# Altium PCB front_flex_dev_board.PcbDoc
Units mil, origin at the board's own origin, x right, y up, seen from the top; angles counter-clockwise.
Board outline 4005 x 780 mil, 2 copper layers (Top Layer, Bottom Layer); 21 components, 39 nets, 78 pads, 0 vias.
Unrouted connection lines stored in the file: 47.
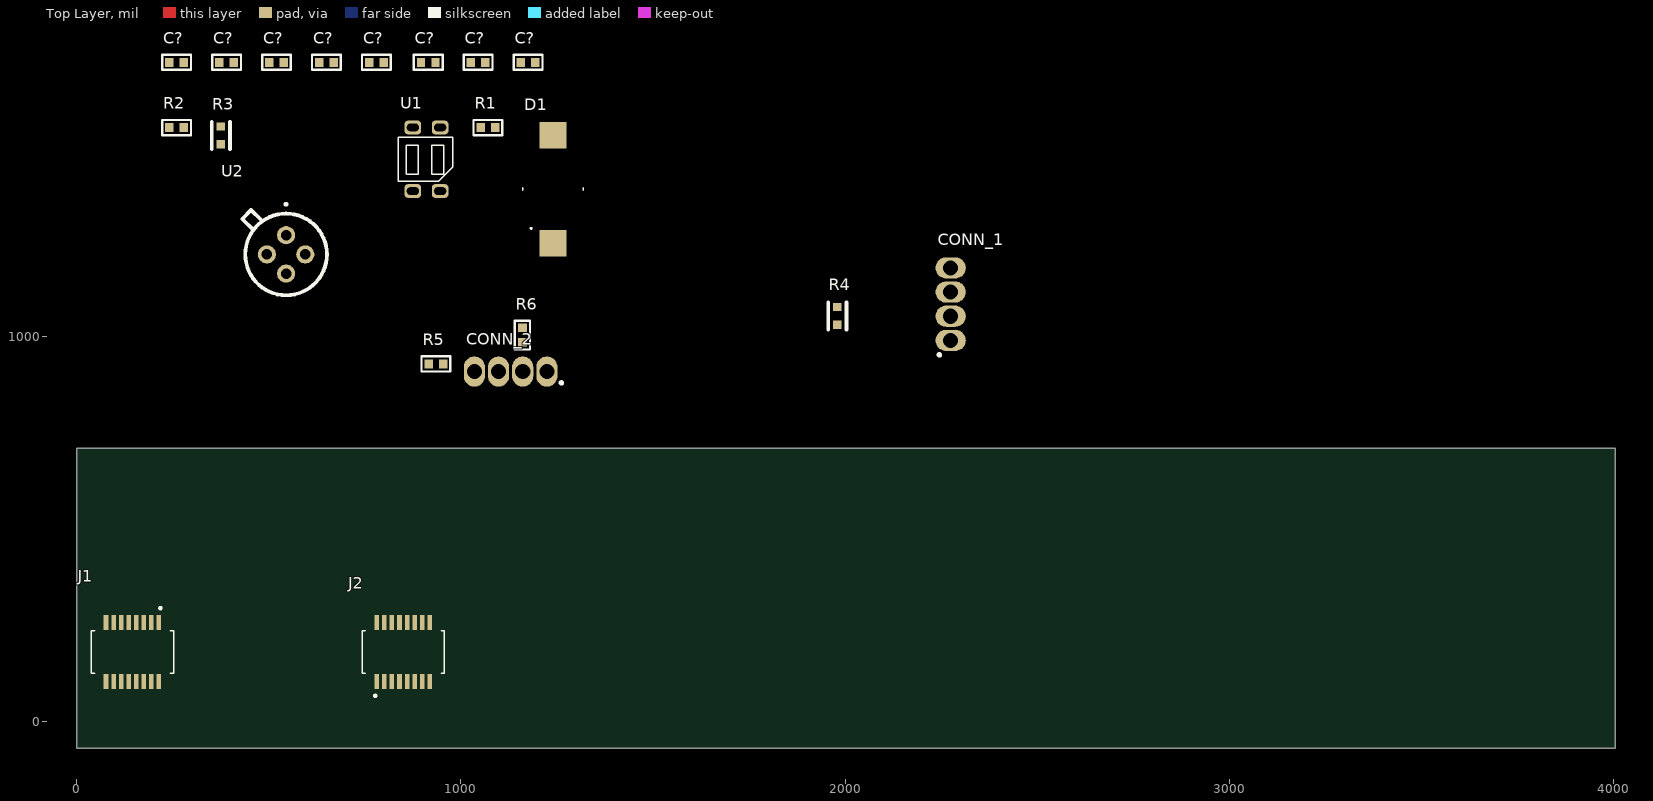
[diagram p0: Top Layer view]
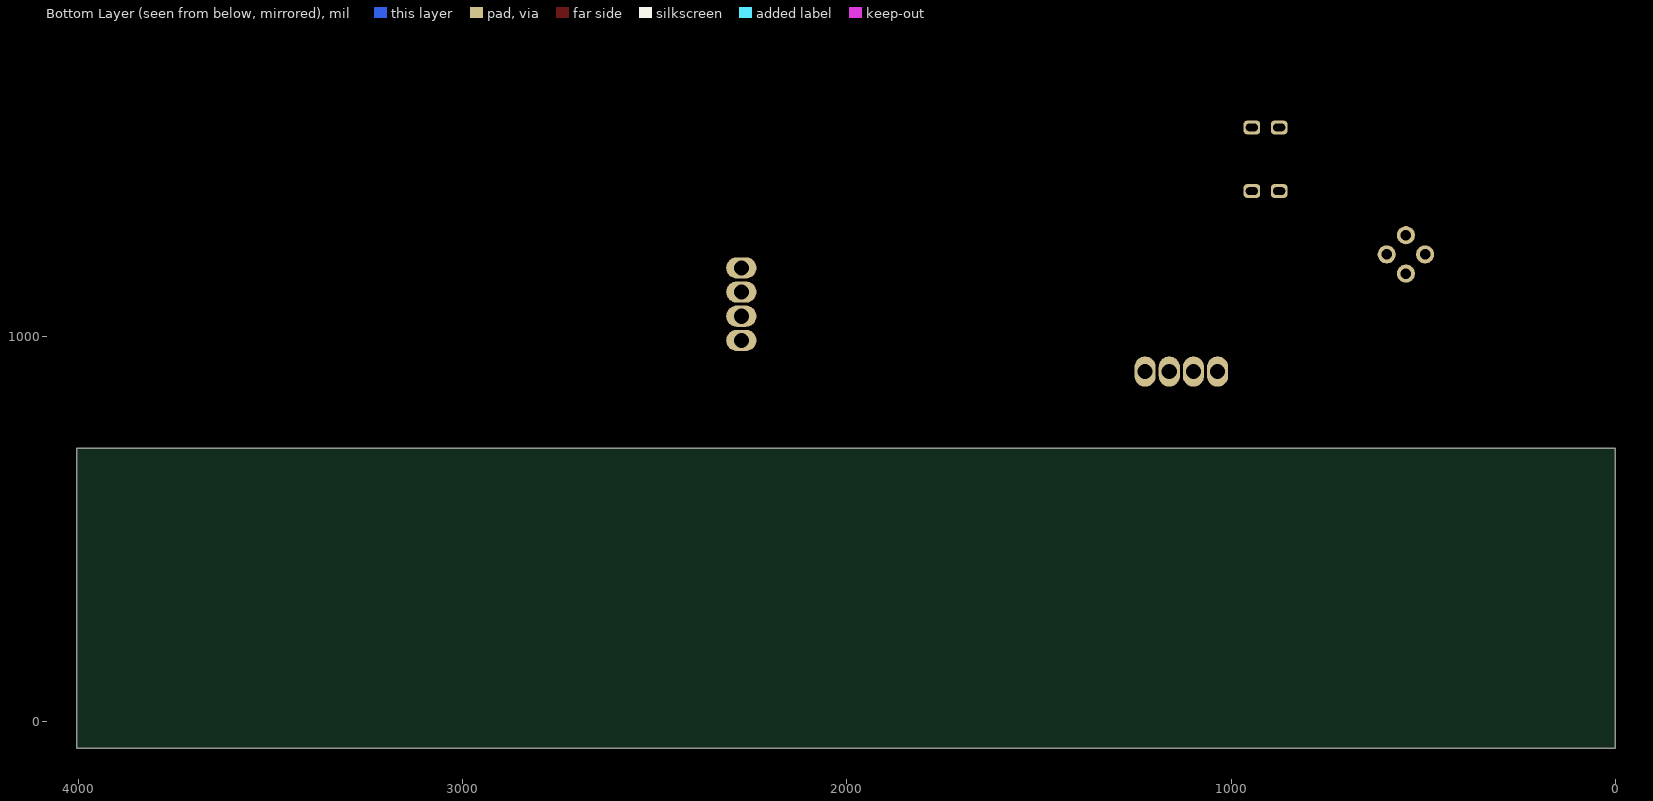
[diagram p1: Bottom Layer view, seen from below]

## Layer stack, top to bottom
Top Solder: solder mask 0.4, Solder Resist, Dk 3.5
Top Layer: signal copper 1.4
Dielectric 1: dielectric 12.6, FR-4, Dk 4.8
Bottom Layer: signal copper 1.4
Bottom Solder: solder mask 0.4, Solder Resist, Dk 3.5

## Board outline
0,-70 4005,-70 4005,710 0,710

## Design rules (kind name [scope] priority, off if disabled: settings)
Clearance [All] p1: gap=6 ignorepadtopadclearanceinfootprint=FALSE except(0: Arc-Hole Track-Hole SMDPad-Hole THPad-Hole Via-Hole Fill-Hole Poly-Hole Region-Hole Text-Hole; 10: Text-Text)
PolygonConnect [All] p1: connectstyle=Relief reliefconductorwidth=10 reliefentries=4 polygonreliefangle="90 Angle" airgapwidth=10
RoutingVias [All] p1: holewidth=9.84 width=19.68 viastyle="Through Hole" minholewidth=7.87 minwidth=15.75 maxholewidth=11.81 maxwidth=23.62
SolderMaskExpansion [All] p1: expansion=4
Width PWR [InNet('GND')] p1: maxlimit=20 minlimit=10 preferedwidth=10 minimp=50.000000 maximp=50.000000 favimp=50.000000
Width [All] p2: maxlimit=10 minlimit=6 preferedwidth=6 minimp=50.000000 maximp=50.000000 favimp=50.000000
30 further rules are at their usual default settings.

## Classes and differential pairs
component class Sch_led: C? IC1 IC2 J1 J2 LED1 LED2 LED3 LED4 LED5 LED6
component class Sch_front: CONN_1 CONN_2 D1 R1 R2 R3 R4 R5 R6 U1 U2

## Components (designator, comment, footprint, x,y, rotation, side; value= is the part's Value field where it differs from the comment)
C? "0.47µF" 0402R 915,1715 r0 top
C? "1µF" 0402R 520,1715 r0 top
C? "0.47µF" 0402R 780,1715 r0 top
C? "1µF" 0402R 650,1715 r0 top
C? "0.47µF" 0402R 390,1715 r0 top
C? "0.47µF" 0402R 260,1715 r0 top
C? "1µF" 0402R 1175,1715 r0 top
C? "1µF" 0402R 1045,1715 r0 top
CONN_1 "THERMO" 4_pos_1mm_header 2275,1085.51 r90 top
CONN_2 "BLINK" 4_pos_1mm_header 1129.49,910 r180 top
D1 "VBPW34FASR" VBPW34FAS 1240,1385 r90 top
J1 "55560-0168" 555600168 145,180 r180 top
J2 "55560-0168" 555600168 850,180 r0 top
R1 "50K" 0402R 1070,1545 r0 top
R2 "100" 0402R 260,1545 r0 top
R3 "100k" SMD-0402-RES 375,1525 r0 top
R4 "100k" SMD-0402-RES 1980,1055 r0 top
R5 "100" 0402R 935,930 r0 top
R6 "50K" 0402R 1160,1005 r90 top
U1 "QRE1113" QRE1113_DIP 875,1380 r0 top
U2 "ZTP-135SR" ZTP-135SR 545,1215 r0 top

## Footprints (in the part's own frame and the unit in brackets; to place one, negate y for a bottom-side part, rotate by r counter-clockwise, add the part's x,y. Pads: shape width x height; smd on the part's side, far side on the other; paste and mask are expansions set on the pad)
4_pos_1mm_header [mm]
  oval 1.4x2 hole 1 mask-0.15: 1(-2.4,0) 2(-0.8,0) 3(0.8,0) 4(2.4,0)
  silkscreen extent -3.4,0.7 -3.3,0.8
0402R [mm]
  rect 0.559x0.6 smd: 1(-0.48,0) 2(0.48,0)
  silkscreen extent -0.95,-0.5 0.95,0.5, body extent -0.46,-0.25 0.5,0.25, height 0.3
555600168 [mm]
  rect 0.3x1 smd: 1(-1.75,-1.95) 2(-1.75,1.95) 3(-1.25,-1.95) 4(-1.25,1.95) 5(-0.75,-1.95) 6(-0.75,1.95) 7(-0.25,-1.95) 8(-0.25,1.95) 9(0.25,-1.95) 10(0.25,1.95) 11(0.75,-1.95) 12(0.75,1.95) 13(1.25,-1.95) 14(1.25,1.95) 15(1.75,-1.95) 16(1.75,1.95)
  silkscreen extent -2.73,-2.95 2.73,1.42, body extent -2.72,-2.15 2.73,2.15, height 1.16
QRE1113_DIP [mm] "QRE1113 IR PHOTODIODE/TRANSISTOR PAIR"
  rrect50% 1.1x0.9 hole 0.5 slot 0.8 at 0 deg: 1(1.8,0) 2(1.8,4.2) 3(0,4.2) 4(0,0)
  silkscreen extent -0.96,0.65 2.64,3.55
SMD-0402-RES [mm]
  rect 0.55x0.55 smd: 1(0,0.584) 2(0,-0.584)
  silkscreen extent -0.6,-0.9 0.6,0.9, body extent -0.28,-0.57 0.27,0.58, height 0.41
VBPW34FAS [mm] "IR Photodiode SMD (Vive)"
  rect 1.75x1.8 smd: 1(-3.575,0) 2(3.575,0)
  silkscreen extent -2.65,-2 0.08,2, body extent -3.29,-1.95 3.11,1.95, height 1.48
ZTP-135SR [mm]
  round 1.2 hole 0.7: 1(0,1.27) 2(1.27,0) 3(0,-1.27) 4(-1.27,0)
  silkscreen extent -2.9,-2.7 2.7,3.35, body extent -4.43,-3.77 3.8,4.46, height 3.4

## Part data
C? C? C? C?: library part GCM155C71A105KE38D, "CAP CER 0.47UF 10V X7S 0402", Digi-Key Part Number=490-13409-1-ND, Manufacturer="Murata Electronics North America", Operating Temperature="-55°C ~ 125°C", Package / Case="0402 (1005 Metric)", Ratings=AEC-Q200, Temperature Coefficient=X7S, Tolerance=±10%, Voltage=10V, @ qty=0, Applications=Automotive, Datasheets=http://www.murata.com/~/media/webrenewal/support/library/catalog/products/capacitor/mlcc/c03e.ashx, Factory Stock=0, Features=-, Height - Seated (Max)=-, Image=//media.digikey.com/Renders/Murata%20Renders/ZRB-SERIES-0402.jpg, Lead Spacing=-, Lead Style=-, Minimum Quantity=1, Mounting Type="Surface Mount, MLCC", Packaging="Cut Tape (CT)", Part Number=GCM155C71A105KE38D, Part Status=Active, Quantity Available=7240, Series=GCM, Size / Dimension="0.039\" L x 0.020\" W (1.00mm x 0.50mm)", Thickness (Max)="0.022\" (0.55mm)", Unit Price (USD)=0.12
C? C? C? C?: library part GCM155C71A105KE38D, "CAP CER 1UF 10V X7S 0402", Digi-Key Part Number=490-13409-1-ND, Manufacturer="Murata Electronics North America", Operating Temperature="-55°C ~ 125°C", Package / Case="0402 (1005 Metric)", Ratings=AEC-Q200, Temperature Coefficient=X7S, Tolerance=±10%, Voltage=10V, @ qty=0, Applications=Automotive, Datasheets=http://www.murata.com/~/media/webrenewal/support/library/catalog/products/capacitor/mlcc/c03e.ashx, Factory Stock=0, Features=-, Height - Seated (Max)=-, Image=//media.digikey.com/Renders/Murata%20Renders/ZRB-SERIES-0402.jpg, Lead Spacing=-, Lead Style=-, Minimum Quantity=1, Mounting Type="Surface Mount, MLCC", Packaging="Cut Tape (CT)", Part Number=GCM155C71A105KE38D, Part Status=Active, Quantity Available=7240, Series=GCM, Size / Dimension="0.039\" L x 0.020\" W (1.00mm x 0.50mm)", Thickness (Max)="0.022\" (0.55mm)", Unit Price (USD)=0.12
CONN_1 CONN_2: library part 4_pin_1mm_header
D1: "Diode", Manufacturer_Name=Vishay, Mouser Part Number=782-VBPW34FASR, RS Part Number=7689401, Datasheet Link=https://www.vishay.com/docs/81127/vbpw34fa.pdf, Height=1.3mm, Manufacturer_Part_Number=VBPW34FASR, Mouser Price/Stock=https://www.mouser.com/Search/Refine.aspx?Keyword=782-VBPW34FASR, RS Price/Stock=https://uk.rs-online.com/web/p/products/7689401
J1 J2: "Connector", Manufacturer_Name=Molex, Mouser Part Number=538-55560-0168, RS Part Number=7206558P, Allied_Number=70374726, Allied Price/Stock=https://www.alliedelec.com/molexincorporated-55560-0168/70374726/, Datasheet Link=https://www.molex.com/pdm_docs/sd/555600168_sd.pdf, Height=1.15mm, Manufacturer_Part_Number=55560-0168, Mouser Price/Stock=https://www.mouser.com/Search/Refine.aspx?Keyword=538-55560-0168, RS Price/Stock=http://uk.rs-online.com/web/p/products/7206558P
R1 R2 R5 R6: library part Resistor
R3 R4: library part ERJ-2GEJ104X, "RES SMD 100K OHM 5% 1/10W 0402", Digi-Key Part Number=P100KJCT-ND, Manufacturer="Panasonic Electronic Components", Operating Temperature="-55°C ~ 155°C", Package / Case="0402 (1005 Metric)", Power (Watts)="0.1W, 1/10W", Supplier Device Package=0402, Temperature Coefficient=±200ppm/°C, Tolerance=±5%, @ qty=1500, Composition="Thick Film", Datasheets=http://industrial.panasonic.com/www-cgi/jvcr13pz.cgi?E+PZ+3+AOA0001+ERJ2GEJ104X+7+WW, Factory Stock=0, Failure Rate=-, Features="Automotive AEC-Q200", Height - Seated (Max)="0.016\" (0.40mm)", Image=//media.digikey.com/Photos/Panasonic%20Photos/ERJ-PA2-Series.jpg, Minimum Quantity=1, Number of Terminations=2, Packaging="Cut Tape (CT)", Part Number=ERJ-2GEJ104X, Part Status=Active, Quantity Available=2387986, Series=ERJ, Size / Dimension="0.039\" L x 0.020\" W (1.00mm x 0.50mm)", Unit Price (USD)=0.00350
U1: "IR Emitter and Receiver"
U2: "Undefined or Miscellaneous", Manufacturer_Name="Amphenol Advanced Sensors", Mouser Part Number=527-ZTP-135SR, Allied_Number=70282698, Allied Price/Stock=https://www.alliedelec.com/amphenol-advanced-sensors-ztp-135sr/70282698/, Datasheet Link=https://www.amphenol-sensors.com/en/component/edocman/370-thermopile-ir-sensor-applications/download?Itemid=7967, Manufacturer_Part_Number=ZTP-135SR, Mouser Price/Stock=https://www.mouser.com/Search/Refine.aspx?Keyword=527-ZTP-135SR

## Nets (pads, with @x,y where several pads share a name; then routed paths per layer and width w, separated by ;. In a path a pad name is that pad's centre, name@x,y a point inside that pad or via, vN(x,y) a via of type N, cw(c..) or ccw(c..) an arc to the next point about the centre after c; other vN are vias at no path point)
3.3V: J1.5 R1.2 R3.1 R4.2 R6.2
5V: J1.13 J2.14
BATTERY_1: J1.4 J2.3
BLINK_CATHODE: CONN_2.3 R5.2
BLINK_PWM: CONN_2.4 J1.2 U1.1
BLINK_SIG: CONN_2.2 J1.7 R1.1 R6.1 U1.3
EXPANSION_INT: J1.12 J2.11
GND: C?.1@501.1,1715 C?.1@631.1,1715 C?.1@1026.1,1715 C?.1@1156.1,1715 CONN_1.4 CONN_2.1 D1.2 J1.6 J1.8 J1.15 J1.16 J2.15 J2.16 R2.2 R5.1 U1.4 U2.1
I2C_SCL: J1.10 J2.9
I2C_SDA: J1.11 J2.12
IMU_INT: J1.9 J2.10
LED_LEFT_FRONT_B: 
LED_LEFT_FRONT_G: 
LED_LEFT_FRONT_R: 
LED_LEFT_SIDE_B: 
LED_LEFT_SIDE_G: 
LED_LEFT_SIDE_R: 
LED_LEFT_TOP_B: 
LED_LEFT_TOP_G: 
LED_LEFT_TOP_R: 
LED_RIGHT_FRONT_B: 
LED_RIGHT_FRONT_G: 
LED_RIGHT_FRONT_R: 
LED_RIGHT_SIDE_B: 
LED_RIGHT_SIDE_G: 
LED_RIGHT_SIDE_R: 
LED_RIGHT_TOP_B: 
LED_RIGHT_TOP_G: 
LED_RIGHT_TOP_R: 
LH_DIODE_ARRAY: D1.1 J1.14 J2.13
NetC?_1: C?.1@241.1,1715
NetC?_2: C?.2@278.9,1715
NetR2_1: R2.1 U1.2
TP_NOSE: CONN_1.3 J2.8 U2.4
TP_NOSE_GND: CONN_1.2 J2.6 U2.2
TP_THERMISTOR: CONN_1.1 J2.7 R3.2 R4.1 U2.3
VBAT: C?.2@538.9,1715 C?.2@1063.9,1715 J1.1 J2.2
VOUT_L_LED: C?.2@668.9,1715
VOUT_R_LED: C?.2@1193.9,1715
pads on no net: C?.1@371.1,1715 C?.1@761.1,1715 C?.1@896.1,1715 C?.2@408.9,1715 C?.2@798.9,1715 C?.2@933.9,1715 J1.3 J2.1 J2.4 J2.5